# EAGLE board ATtiny85 and DRV8830 Combo -- v03 (EAGLE 6.5.0)
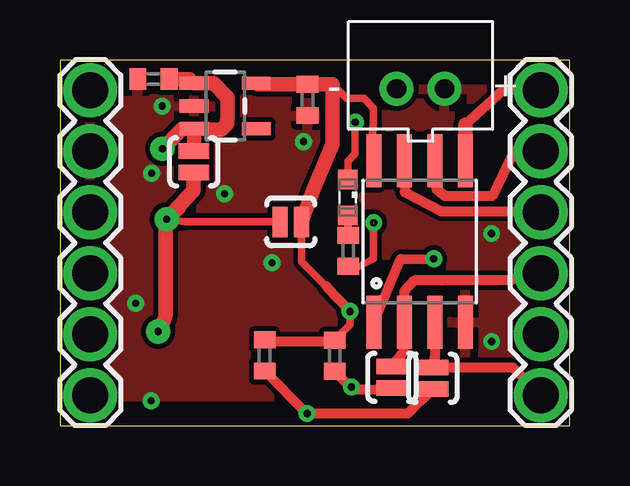
[diagram p0: board, top side]
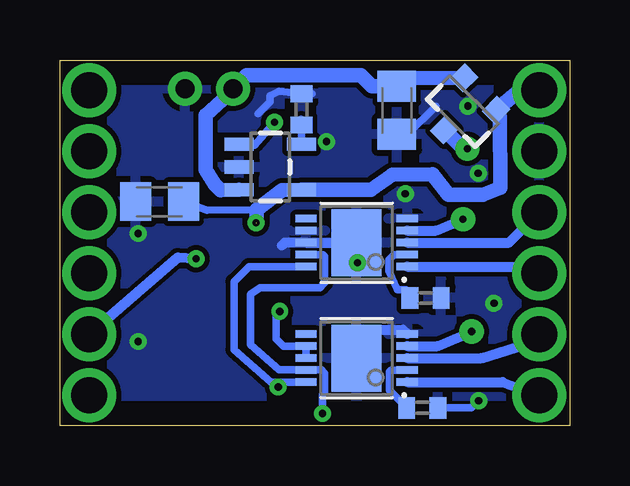
[diagram p1: board, bottom side, seen from below]

Size 21.26 x 15.23 mm. Coordinates in mm from the lower left corner, seen from the top.
Outline: 0,0 21.26,0 21.26,15.23 0,15.23 0,0
Copper layers (1*16): Top 0.035mm / dielectric 1.5mm / Bottom 0.035mm
Design rules "default *": minimum track width 10mil, minimum drill 24mil, track to track 8mil, track to pad 8mil, pad to pad 8mil, via to via 8mil, smd to smd 8mil, copper to edge 40mil, drill to drill 8mil, minimum pad ring 10mil, minimum via ring 8mil, stop-mask expansion 4mil, vias tented up to drill 0.3mm, thermal gap 10mil

## Footprints (pad centres in the part's own frame; a part is rotated, then mirrored left to right if it is on the bottom)
R0402 = smd 0.7 x 0.9: 1 -0.65,0; 2 0.65,0
C0402 = smd 0.7 x 0.9: 1 -0.65,0; 2 0.65,0
C0805K = smd 1.3 x 1.6: 1 -1,0; 2 1,0
JST-PH-2-THM = drill 0.8 pad 1.422: 1 1,0; 2 -1,0
SOT23-3 = smd 0.8 x 0.9: 1 -0.95,-1; 2 0.95,-1; 3 0,1.1
SML0603 = smd 0.8 x 0.8: A 0.75,0; C -0.75,0
SJ_2S-NO = smd 0.635 x 1.27: 1 -0.45,0; 2 0.45,0
SOT23-5 = smd 0.55 x 1.2: 1 -0.95,-1.3; 2 0,-1.3; 3 0.95,-1.3; 4 0.95,1.3; 5 -0.95,1.3
MSOP-10-GNDPAD = smd 0.305 x 0.889: 1 -1,-2.11; 2 -0.5,-2.11; 3 0,-2.11; 4 0.5,-2.11; 5 1,-2.11; 6 1,2.11; 7 0.5,2.11; 8 0,2.11; 9 -0.5,2.11; 10 -1,2.11 | smd 2.794 x 2.083: GND 0,0
1X6_SHORT_ROUND = drill 1.5 pad 2.2: 1 1.27,-1.27; 2 3.81,-1.27; 3 6.35,-1.27; 4 8.89,-1.27; 5 11.43,-1.27; 6 13.97,-1.27
SO08-EIAJ = smd 0.61 x 2.21: 1 -1.905,-3.378; 2 -0.635,-3.378; 3 0.635,-3.378; 4 1.905,-3.378; 5 1.905,3.353; 6 0.635,3.353; 7 -0.635,3.353; 8 -1.905,3.353

## Placement (x,y rotation side)
1K  R3  [R0402]  8.54,2.92 270 top
C1  1uf  [C0402]  3.9,14.44 180 top
C2  1uf  [C0402]  10.32,13.56 270 top
C3  4.7UF  [C0805K]  7.21,13.13 270 bottom
C4  4.7UF  [C0805K]  17.11,9.33 180 bottom
CN1  [JST-PH-2-THM]  15.04,14.04 0 top
DMP1045U  MOSFET-PCHANNELSMD  [SOT23-3]  4.45,13.1 135 bottom
LED2  [SML0603]  12,9.5 270 top
R1  .33  [R0402]  6.02,5.31 180 bottom
R2  1k  [R0402]  11.46,2.91 270 top
R3  .33  [R0402]  6.15,0.74 180 bottom
R4  2k  [R0402]  11.19,13.17 270 bottom
R5  330  [R0402]  12.02,7.28 270 top
RAW  SOLDERJUMPERNO  [SJ_2S-NO]  5.58,10.99 270 top
SJ6  SOLDERJUMPERNO  [SJ_2S-NO]  15.56,1.97 90 top
SJ7  SOLDERJUMPERNO  [SJ_2S-NO]  13.84,2.01 90 top
U1  V_REG_LDOSMD  [SOT23-5]  6.89,13.31 270 top
U2  DRV8830  [MSOP-10-GNDPAD]  8.89,2.81 90 bottom
U3  DRV8830  [MSOP-10-GNDPAD]  8.89,7.62 90 bottom
U4  MCP73831  [SOT23-5]  12.49,10.77 270 bottom
U$1  1X6_SHORT_ROUND  [1X6_SHORT_ROUND]  21.31,15.24 270 top
U$2  ATTINY85  [SO08-EIAJ]  15,7.69 0 top
U$4  1X6_SHORT_ROUND  [1X6_SHORT_ROUND]  2.54,15.24 270 top
VREG  SOLDERJUMPERNO  [SJ_2S-NO]  9.63,8.48 180 top

## Library data of the parts
1K C1-C4 R1-R5 = resistor
CN1 = adafruit
DMP1045U = SparkFun-DiscreteSemi
LED2 = led
RAW SJ6 SJ7 U1 U$2 VREG = SparkFun
U2 U3 = SparkFun-PowerIC; PROD_ID: IC-11646
U4 = SparkFun-PowerIC; PROD_ID: IC-09995
U$1 U$4 = Random parts(01-14-14)

## Nets
BAT_RAW: C1.1 DMP1045U.3 RAW.1 U1.1 U1.3
EXT_RAW: C4.1 DMP1045U.1 R5.2 U4.4 U$4.1
GND: C1.2 C2.2 C3.2 C4.2 CN1.1 R1.1 R3.1 R4.1 U1.2 U2.5 U2.GND U3.5 U3.7 U3.8 U3.GND U4.2 U$2.4 U$4.2
N$1: R1.2 U3.2
N$2: R3.2 U2.2
N$3: U2.3 U$4.5
N$4: U2.1 U$4.6
N$5: U3.1 U$4.4
N$6: U3.3 U$4.3
N$7: LED2.A R5.1
N$8: C3.1 CN1.2 DMP1045U.2 U4.3
N$9: R4.2 U4.5
N$10: LED2.C U4.1
PB0: U$1.1 U$2.5
PB1: U$1.2 U$2.6
PB2: U$1.3 U$2.7
PB3: SJ7.2 U$1.4 U$2.2
PB4: SJ6.2 U$1.6 U$2.3
PB5: U$1.5 U$2.1
SCL: R2.2 SJ7.1 U2.10 U3.10
SDA: 1K.2 SJ6.1 U2.9 U3.9
VCC: RAW.2 U2.4 U3.4 VREG.2
VREG: 1K.1 C2.1 R2.1 U1.5 U2.7 U2.8 U$2.8 VREG.1

## Tracks (layer width: path | path; a pad name or v marks a point on that pad's centre or on a via)
BAT_RAW  (via drill 0.3 pad 1.02)
  Top 0.305: 5.41,14.44 U1.1 5.97,14.26 | RAW.1
  Top 0.61: U1.3 RAW.1 | 5.41,14.44 C1.1 | U1.3 6.14,12.36 6.19,12.31 6.72,12.31 6.98,12.57 6.98,12.74 7,12.76 7,13.66 6.4,14.26 U1.1 | U1.3 5.1,12.36 v4.27,11.53
  Bottom 0.61: v4.27,11.53 4.44,11.53 DMP1045U.3
EXT_RAW  (via drill 0.3 pad 0.3)  (1 unrouted)
  Top 0.305: R5.2 12.49,6.63 13.07,6.96 13.07,8.43
  Bottom 0.305: 13.06,8.99 15.13,8.98 C4.1
  Bottom 0.406: 13.06,8.47 v13.08,8.45
  Bottom 0.61: U$4.1 2.08,13.97 DMP1045U.1 2.91,12.86 2.9,9.9 3.63,9.61 5.06,9.61 5.74,10.48 7.4,10.46 8.29,9.81 U4.4 12.01,9.8 13.06,8.99 13.06,8.47
GND  (via drill 0.3)
  Top 0.305: C1.2 3.25,14.24
  Bottom 0.305: R3.1 4.09,0.74 v3.8,1.03 | 13,13 12.5,13.5 12.5,13.74 12.13,13.94 R4.1 10.76,13.82 | C3.2 6.77,12.13 U1.2
  Bottom 0.406: U3.GND U3.8 11.88,7.62 12,7.5 | U2.GND 8.89,3.61 8.5,4 6.97,4 U2.5
  other vias: 6.86,9.65 8.85,6.78 18,3.5 3.16,5.09 18,8 3.82,10.51 10.15,11.83 4.26,13.31
  pour Bottom: 0,0 0,15.24 21.59,15.24 21.59,0
  pour Top: 0,0 0,15.24 21.59,15.24 21.59,0
N$1
  Bottom 0.305: U3.2 7.33,7.12 7.54,6.92 7.54,6.42 7.18,5.66 6.82,5.66 6.69,5.33 R1.2
N$2
  Bottom 0.305: U2.2 7.45,2.31 7.53,2.23 7.53,1.46 R3.2
N$3
  Bottom 0.406: U2.3 3.69,2.81 1.5,3.5 U$4.5
N$4
  Bottom 0.406: U2.1 2.81,1.81 U$4.6
N$5
  Bottom 0.406: U3.1 1.54,6.62 U$4.4
N$6
  Bottom 0.406: U3.3 2.54,7.62 U$4.3
N$7
  Top 0.305: LED2.A R5.1
N$8
  Bottom 0.305: 7.03,14.48 C3.1
  Bottom 0.61: DMP1045U.2 7.03,14.48 | U4.3 14.57,9.81 14.82,10.06 15.18,10.66 15.18,12.94 14.04,13.96 CN1.2 13.48,14.59 8.71,14.59 8.25,14.13 C3.1
N$9
  Bottom 0.305: R4.2 11.2,12.76 U4.5
N$10  (via drill 0.3 pad 0.3)
  Top 0.305: LED2.C 12,11.01 12.31,11.32 12.31,12.31 v12.32,12.63
  Bottom 0.305: v12.32,12.63 13.15,11.69 U4.1
PB0
  Top 0.406: 16.91,12.53 18.5,14 20.01,14 U$1.1
  Top 0.61: U$2.5 16.91,12.53
PB1
  Top 0.406: U$1.2 18.93,11.43 18.02,9.56 16.04,9.56 15.71,9.84 15.71,10.69 U$2.6
PB2
  Top 0.406: U$2.7 14.38,9.73 15.9,8.92 18.83,8.92 U$1.3
PB3
  Top 0.406: U$1.4 20.04,6.46 18.78,6.05 15.91,6.05 14.78,6.05 14.35,5.57 U$2.2 14.32,3.06 13.85,2.48 13.97,2.54 SJ7.2
PB4
  Top 0.406: U$2.3 15.64,2.9 SJ6.2 18.89,2.42 U$1.6
PB5  (via drill 0.3)
  Top 0.406: U$2.1 14.2,6.93 v15.59,6.95
  Bottom 0.406: v15.59,6.95 16.35,7 U$1.5
SCL  (via drill 0.3)
  Top 0.305: 12.21,1.5 12.21,1.55 v12.16,1.6
  Top 0.406: SJ7.1 12.78,1.5 12.21,1.5 R2.2
  Bottom 0.305: U3.10 13.38,6.62 14,6 14,3.16 12.45,1.81 12.36,1.81 | 12.36,1.81 10.92,1.81 U2.10 | 12.36,1.81 v12.16,1.6
SDA  (via drill 0.3)
  Top 0.406: SJ6.1 14.96,0.96 14.5,0.5 v10.31,0.5 1K.2
  Bottom 0.305: U3.9 10.29,7.12 10.22,7.05 10.22,5.94 10.41,5.75 12.93,5.75 13.31,5.47 13.3,3.37 12.12,2.32 U2.9 10.99,2.32 10.35,2.32 10.24,2.19 10.24,1.37 10.31,1.3 v10.31,0.5
VCC  (via drill 0.3 pad 1.02)
  Top 0.305: VREG.2 5.23,8.48 v4.45,8.59
  Top 0.61: v4.1,3.92 4.31,4.35 4.41,4.59 4.4,8.55 4.97,9.1 4.85,8.97 v4.45,8.59 5.58,9.81 RAW.2
  Bottom 0.406: U3.4 5.59,8.12 v4.45,8.59 | U2.4 5.51,3.31 v4.1,3.92
VREG  (via drill 0.3)
  Top 0.305: v12.09,4.75 12.09,4.19 R2.1 | 8.23,14.21 U1.5 | VREG.1 10.07,6.83 11.12,5.78 | 13,11.12 13,11.89 13.08,12.64 13.08,13.21 12.68,13.65 11.94,13.65 11.37,14.21
  Top 0.406: 13,11.12 U$2.8 | 11.12,5.78 v12.09,4.75 | 1K.1 8.5,3.54 8.5,3.5 11.5,3.5 11.46,3.54 R2.1
  Top 0.61: VREG.1 10.57,9.86 11.37,11.71 11.37,14.21 C2.1 8.23,14.21
  Bottom 0.305: U2.8 U2.7 11.93,3.31 12.24,3.62 12.24,4.61 v12.09,4.75